# Altium PCB Pedal_Filters_45.PcbDoc (part 3 of 4)
Units mil, origin at the board's own origin, x right, y up, seen from the top; angles counter-clockwise.
Board outline 4875 x 3407.56 mil, 4 copper layers (Top Layer, Layer 1, Layer 2, Bottom Layer); 245 components, 181 nets, 874 pads, 470 vias.
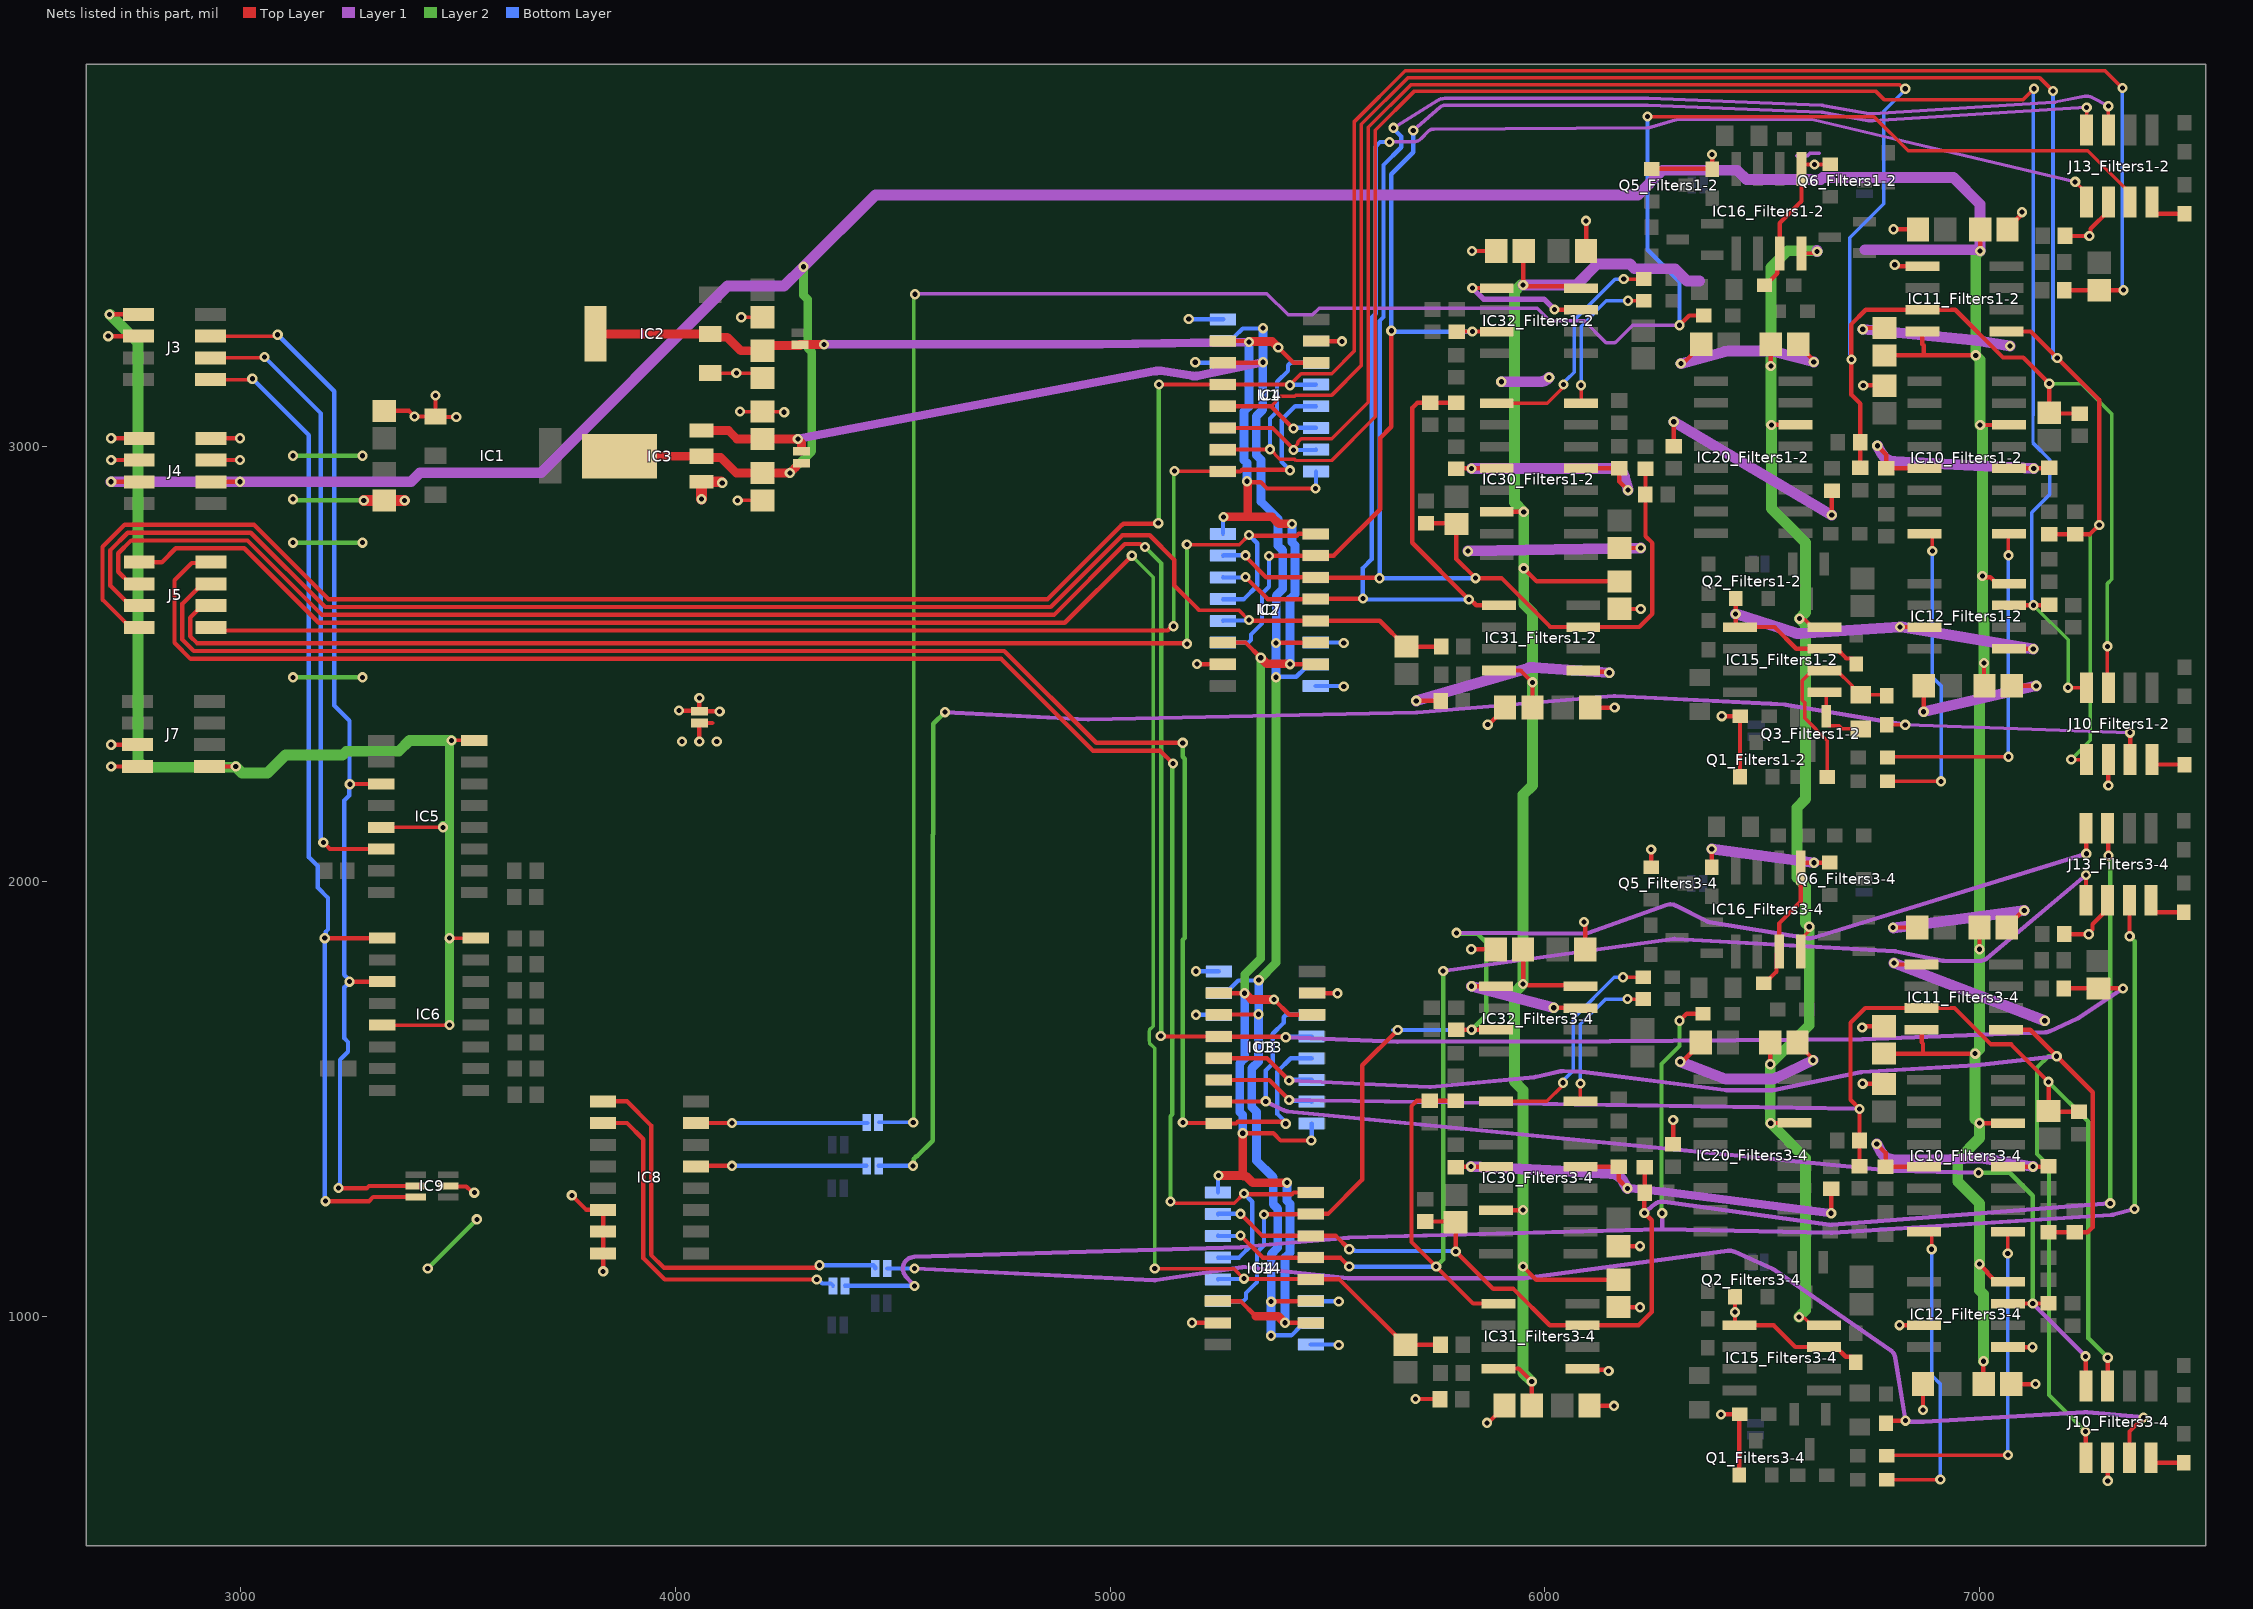
[diagram p4: the nets of this part, all layers, seen from the top]

## Via types
v1: diameter 23.62, hole 11.81, Top Layer to Bottom Layer, 470 vias

## Nets (pads, with @x,y where several pads share a name; then routed paths per layer and width w, separated by ;. In a path a pad name is that pad's centre, name@x,y a point inside that pad or via, vN(x,y) a via of type N, cw(c..) or ccw(c..) an arc to the next point about the centre after c; other vN are vias at no path point) (continued)
+V_MUX: C4.2 IC2.2 IC2.4 IC4.2 IC4.14 IC7.2 IC7.14 IC13.2 IC13.14 IC14.2 IC14.14 J1.1 U1.16 U2.16 U3.16 U4.16 | length 5561.9
  Top Layer w10: IC14.14@5247.63,1035.08 5299.92,1035.08 5334.92,1000.08 ; IC13.2@5250.08,1743.74 5250.23,1743.59 5309.19,1743.59 v1@5310.14,1742.64 ; IC7.14@5259.09,2550.08 5311.37,2550.08 v1(5346.37,2515.08) ; IC4.2@5259.57,3243.74 5319.04,3243.74 v1@5320.14,3242.64 ; v1(5305.04,1421.22) 5375.55,1421.22 5392.13,1404.64 v1(5462.64,1404.64) ; v1@5317.52,2918.74 5346.85,2918.74 5360.95,2904.64 v1(5472.64,2904.64) ; v1(5376.85,1728.74) 5411.85,1693.74 IC13.14@5464.14,1693.74 ; v1(5386.85,3228.74) 5421.85,3193.74 IC4.14@5474.14,3193.74 ; v1@5401.63,986.18 5402.58,985.23 5461.54,985.23 IC14.2@5461.69,985.08 ; v1@5413.09,2501.18 5414.04,2500.23 5473.51,2500.23 IC7.2@5473.66,2500.08
  Top Layer w20: IC2.4@3816.22,3260.16 IC2.2@4080,3260.16 4087.66,3252.5 4119.06,3252.5 4150.07,3221.5 C4.2@4200,3221.5 4212.04,3233.54 J1.1@4286.59,3233.54 ; J1.1@4286.59,3235.67 v1(4341.73,3235.67) ; v1(5249.13,1324.18) 5304.97,1324.18 ; v1(5260.59,2839.18) 5316.43,2839.18 ; v1(5305.04,1421.22) v1(5305.04,1421.22) 5304.97,1324.18 ; v1@5310.14,1742.64 5310.25,1742.75 5311.01,1742.75 5325.02,1728.74 v1(5376.85,1728.74) ; v1(5315.04,2921.22) 5315.74,2920.53 5315.74,2917.96 5316.43,2917.27 5316.43,2839.18 ; v1(5319.34,3241.65) 5320.14,3242.45 5320.14,3242.64 5372.95,3242.64 v1(5386.85,3228.74) ; 5334.92,1000.08 5386.75,1000.08 5400.76,986.07 5401.53,986.07 v1@5401.63,986.18 ; v1(5346.37,2515.08) 5360.28,2501.18 v1@5413.09,2501.18 ; v1(5406.73,1307.6) 5327.9,1307.6 5313.07,1322.44 5306.72,1322.44 5304.97,1324.18 ; v1(5418.19,2822.6) 5417.49,2823.29 5388.16,2823.29 5372.27,2839.18 5316.43,2839.18
  Layer 1 w20: v1(4341.73,3235.67) 4981.2,3236.46 ccw(c4981.16,3268.27) 4981.65,3236.46 v1(5319.34,3241.65)
  Layer 2 w20: v1(5309.34,1743.44) 5309.96,1744.06 5309.96,1786.64 5346.37,1823.05 v1(5346.37,2515.08)
  Bottom Layer w10: U4.16@5248.15,1285.08 5248.15,1323.19 v1(5249.13,1324.18) ; U2.16@5259.6,2800.08 5259.6,2838.19 v1(5260.59,2839.18) ; v1(5462.64,1404.64) 5463.63,1405.62 U3.16@5463.63,1443.74 ; v1(5472.64,2904.64) 5473.63,2905.62 U1.16@5473.63,2943.74
  Bottom Layer w20: v1(5305.04,1421.22) 5304.97,1421.29 5304.97,1463.03 5298.12,1469.88 5298.12,1572.5 5298.12,1582.13 5309.33,1593.34 v1(5309.34,1743.44) ; v1(5315.04,2921.22) 5314.97,2921.29 5314.97,2963.03 5308.12,2969.88 5308.12,3072.5 5308.12,3082.13 5319.33,3093.34 v1@5319.33,3241.64 ; v1(5402.43,985.38) 5402.44,1135.48 5413.65,1146.69 5413.65,1156.32 5413.65,1258.94 5406.8,1265.79 5406.8,1307.53 v1(5406.73,1307.6) ; v1(5413.89,2500.38) 5413.89,2650.48 5425.11,2661.69 5425.11,2671.32 5425.11,2773.94 5418.26,2780.79 5418.26,2822.53 v1(5418.19,2822.6)
-12: C7.1 C20_Filters1-2.2 C20_Filters3-4.2 C21_Filters1-2.2 C21_Filters3-4.2 C22_Filters1-2.2 C22_Filters3-4.2 C23_Filters1-2.2 C23_Filters3-4.2 C24_Filters1-2.2 C24_Filters3-4.2 C25_Filters1-2.2 C25_Filters3-4.2 C26_Filters1-2.2 C26_Filters3-4.2 IC3.2 IC3.4 IC10_Filters1-2.6 IC10_Filters3-4.6 IC11_Filters1-2.8 IC11_Filters3-4.8 IC12_Filters1-2.8 IC12_Filters3-4.8 IC15_Filters1-2.4 IC15_Filters3-4.4 IC16_Filters1-2.4 IC16_Filters3-4.4 IC20_Filters1-2.6 IC20_Filters3-4.6 IC30_Filters1-2.6 IC30_Filters3-4.6 IC31_Filters1-2.4 IC31_Filters3-4.4 IC32_Filters1-2.4 IC32_Filters3-4.4 J2.2 J4.5 J4.6 | length 17229.4
  Top Layer w8: v1(6584.66,998.7) 6587.65,995.71 6597.7,995.71 6614,979.41 IC15_Filters3-4.4@6642,979.41 ; v1(6586.16,2605.05) 6589.15,2602.06 6599.2,2602.06 6615.5,2585.76 IC15_Filters1-2.4@6643.5,2585.76 ; IC16_Filters3-4.4@6589,1839 6589,1867 6605.3,1883.3 6605.3,1893.35 v1(6608.29,1896.34) ; IC16_Filters1-2.4@6590.5,3445.35 6617.97,3445.35 6622.36,3449.73 v1(6626.58,3449.73)
  Top Layer w10: v1(2701.81,2920) J4.6@2766.46,2920 ; J4.5@2931.81,2920 v1(2998.27,2920) ; IC30_Filters3-4.6@5888,1244.41 v1(5950,1244.41) ; IC30_Filters1-2.6@5889.5,2850.76 v1(5951.5,2850.76) ; IC31_Filters3-4.4@5893,879.41 5893.59,880 5940,880 v1(5970,850) C21_Filters3-4.2@5970,794.41 ; IC31_Filters1-2.4@5894.5,2485.76 5944.24,2485.76 v1(5971.5,2458.5) C21_Filters1-2.2@5971.5,2400.76 ; v1@5949.67,3370.76 5950.45,3369.97 6078.99,3369.97 IC32_Filters1-2.4@6083.35,3365.61 ; v1(5950,1114.41) 5980,1084.41 C25_Filters3-4.2@6170,1084.41 ; C22_Filters3-4.2@5950,1844.41 v1(5950,1764.41) 5952.57,1761.84 6079.29,1761.84 IC32_Filters3-4.4@6081.86,1759.27 ; v1(5950.16,3372.58) 5950.16,3449.43 C22_Filters1-2.2@5951.5,3450.76 ; v1(5951.5,2720.76) 5981.5,2690.76 C25_Filters1-2.2@6171.5,2690.76 ; v1(6518.5,1580) C26_Filters3-4.2@6518.5,1630 ; v1(6519.7,1444.15) 6520.24,1444.69 6574.28,1444.69 IC20_Filters3-4.6@6574.83,1445.23 ; v1(6520,3186.35) C26_Filters1-2.2@6520,3236.35 ; v1(6521.2,3050.5) 6521.74,3051.04 6575.78,3051.04 IC20_Filters1-2.6@6576.32,3051.58 ; C23_Filters3-4.2@6780,1604.41 6870,1604.41 ; C23_Filters1-2.2@6781.5,3210.76 6871.5,3210.76 ; IC11_Filters3-4.8@6867,1659.41 6867,1630.41 6870,1627.41 6870,1604.41 ; IC11_Filters1-2.8@6868.5,3265.76 6868.5,3236.76 6871.5,3233.76 6871.5,3210.76 ; v1(6990,1604.41) 6870,1604.41 ; v1(6991.5,3210.76) 6871.5,3210.76 ; v1(7000,1120) 7017.86,1102.14 7017.86,1099.55 7038,1079.41 IC12_Filters3-4.8@7066,1079.41 ; v1(7000,1444.41) IC10_Filters3-4.6@7066,1444.41 ; v1(7000,1844.41) C20_Filters3-4.2@7000,1894.41 ; v1(7001.5,3050.76) IC10_Filters1-2.6@7067.5,3050.76 ; v1(7001.5,3450.76) C20_Filters1-2.2@7001.5,3500.76 ; v1(7006.54,2703.31) 7009.15,2700.71 7024.55,2700.71 7039.5,2685.76 IC12_Filters1-2.8@7067.5,2685.76 ; v1(7009.03,896.58) 7009.03,845.38 C24_Filters3-4.2@7010,844.41 ; v1(7010.53,2502.93) 7010.53,2451.73 C24_Filters1-2.2@7011.5,2450.76
  Top Layer w20: IC3.4@3871.02,2979.06 IC3.2@4060,2979.06 4063.38,2975.68 4104.32,2975.68 4140,2940 C7.1@4200,2940 v1(4263.13,2940) J2.2@4276.14,2953.02
  Layer 1 w8: 6580,3670 6604.43,3670 6609.99,3675.56 6631.38,3675.56
  Layer 1 w25: v1(2701.81,2920) v1(2998.27,2920) 3391.48,2920 3412.33,2940.85 3690.85,2940.85 4120,3370 4249.98,3370 v1(4294.67,3414.69) ; v1(4294.67,3414.69) 4460,3580 6214.63,3580 6271.28,3636.66 6442.48,3636.66 6463.7,3615.44 6634.9,3615.44 6639.46,3620 6940,3620 7001.5,3558.5 v1(7001.5,3450.76) 6998.56,3453.69 6736.31,3453.69 ; v1(5950.16,3372.58) 6072.58,3372.58 6120.66,3420.66 6195.71,3420.66 6206.37,3410 6299.32,3410 6327.28,3382.04 6355.71,3382.04 ; v1(6626.58,3449.73) v1@6626.58,3451.75
  Layer 2 w20: v1(4263.13,2940) 4313.31,2990.18 4313.31,3219.11 4303.99,3228.42 4303.99,3339.84 4294.67,3349.16 v1(4294.67,3414.69)
  Layer 2 w25: v1(5950.16,3372.58) 5944.64,3372.58 5930,3357.94 5930,2872.25 v1(5951.5,2850.76) v1(5951.5,2720.76) 5951.5,2638.5 5971.5,2618.5 v1(5971.5,2458.5) 5971.5,2221.5 5950,2200 v1(5950,1764.41) 5930,1744.41 5930,1540 5950,1520 v1(5950,1244.41) v1(5950,1114.41) 5950,870 v1(5970,850) ; v1(6584.66,998.7) 6600,1014.03 6600,1363.86 v1(6519.7,1444.15) 6518.5,1445.35 v1(6518.5,1580) 6608.29,1669.78 v1(6608.29,1896.34) 6600,1904.63 6600,1990 6580,2010 6580,2170 6600,2190 6600,2591.2 v1(6586.16,2605.05) 6600,2618.89 6600,2780 6521.2,2858.8 v1(6521.2,3050.5) 6520,3051.7 v1(6520,3186.35) 6520,3412.9 6558.61,3451.51 6624.81,3451.51 v1(6626.58,3449.73) ; v1(7001.5,3450.76) 6991.5,3440.76 v1(6991.5,3210.76) 7001.5,3200.76 v1(7001.5,3050.76) 7006.54,3045.71 v1(7006.54,2703.31) 7006.54,2603.46 7010.53,2599.47 v1(7010.53,2502.93) 7010,2502.4 7010,2450 7000,2440 v1(7000,1844.41) 7000,1614.41 v1(6990,1604.41) 6990,1454.41 v1(7000,1444.41) 7000,1410 6950,1360 6950,1310 7000,1260 v1(7000,1120) 7000,1060 7009.03,1050.97 v1(7009.03,896.58)
-V_MUX: C8.1 IC3.3 IC4.3 IC7.3 IC13.3 IC14.3 J2.1 U1.7 U2.7 U3.7 U4.7 | length 4545.8
  Top Layer w10: IC13.3@5250.08,1693.74 5250.72,1694.37 5340.79,1694.37 v1(5341.42,1695.01) ; IC4.3@5259.57,3193.74 5350.15,3193.74 v1(5351.42,3195.01) ; v1(5370.35,1033.81) 5370.98,1034.45 5461.06,1034.45 IC14.3@5461.69,1035.08 ; v1(5381.81,2548.81) 5382.44,2549.45 5472.51,2549.45 IC7.3@5473.15,2550.08
  Top Layer w20: IC3.3@4060,3038.11 4121.89,3038.11 4141.5,3018.5 C8.1@4200,3018.5 v1(4281.5,3018.5) 4290,3010 J2.1@4290,2990
  Layer 1 w20: v1(4281.5,3018.5) 5106.72,3174.99 cw(c5112.65,3143.74) 5117.67,3175.15 5190.77,3163.47 ccw(c5195.79,3194.89) 5202.31,3163.75 v1(5351.42,3195.01)
  Layer 2 w20: v1(5341.77,1773.46) 5381.46,1813.15 v1(5381.46,2470.36)
  Bottom Layer w10: U3.7@5250.08,1743.74 5266.34,1743.74 5275.12,1752.52 5275.12,1752.89 5294.83,1772.59 5340.9,1772.59 v1(5341.77,1773.46) ; U1.7@5260.08,3243.74 5276.34,3243.74 5285.12,3252.52 5285.12,3252.89 5304.83,3272.59 5350.9,3272.59 v1(5351.77,3273.46) ; v1(5370,955.36) 5370.87,956.22 5416.94,956.22 5436.65,975.93 5436.65,976.3 5445.43,985.08 U4.7@5461.69,985.08 ; v1(5381.46,2470.36) 5382.32,2471.22 5428.4,2471.22 5448.11,2490.93 5448.11,2491.3 5456.89,2500.08 U2.7@5473.15,2500.08
  Bottom Layer w20: v1(5341.77,1773.46) 5341.77,1695.36 v1(5341.42,1695.01) 5341.42,1585.83 5326.12,1570.53 5326.12,1560.91 5326.12,1481.48 5336.85,1470.74 5336.85,1358.14 5374.92,1320.08 5374.92,1258.07 5385.65,1247.34 5385.65,1167.91 5385.65,1158.29 5370.35,1142.99 v1(5370.35,1033.81) 5370,1033.46 v1(5370,955.36) ; v1(5351.77,3273.46) 5351.77,3195.36 v1(5351.42,3195.01) 5351.42,3085.83 5336.12,3070.53 5336.12,3060.91 5336.12,2981.48 5346.85,2970.74 5346.85,2874.6 5386.37,2835.08 5386.37,2773.07 5397.11,2762.34 5397.11,2682.91 5397.11,2673.29 5381.81,2657.99 v1(5381.81,2548.81) 5381.46,2548.46 v1(5381.46,2470.36)
CLK: IC5.11 IC6.11 IC9.2 J3.3 | length 2541.8
  Top Layer w8: J3.3@2930,3255 3077.36,3255 3080.63,3258.27 v1(3084.86,3258.27)
  Top Layer w10: v1(3225,1295) 3290,1295 3295,1300 IC9.2@3402.6,1300 ; v1(3250,1770) IC6.11@3325.43,1770 ; v1(3250.91,2224.09) 3251.37,2224.54 3322.26,2224.54 IC5.11@3322.72,2225
  Bottom Layer w10: v1(3084.86,3258.27) 3214.86,3128.27 3214.86,2405.14 3250,2370 v1@3250,2225 ; v1(3225,1295) 3227.61,1297.61 3227.61,1307.09 3228.19,1307.67 3228.19,1590.27 3246.81,1608.89 3246.81,1631.11 3238.38,1639.54 3238.38,1757.33 3250,1768.96 3250,1773.69 3238.19,1785.5 3238.19,2186.7 3249.68,2198.19 3249.68,2222.85 v1(3250.91,2224.09)
DGND: IC5.8 IC5.13 IC6.8 IC6.13 J3.2 J3.4 J6.1 J7.6 J7.7 J7.8 | length 3297
  Top Layer w8: IC5.13@3322.72,2125 v1(3465,2125) ; IC6.13@3325.43,1670 v1(3480,1670) ; v1(3480,1870) IC6.8@3540,1870 ; v1(3485,2325) IC5.8@3537.28,2325
  Top Layer w10: v1(2695,3255) J3.4@2764.65,3255 ; v1(2698.19,3305) J3.2@2764.65,3305 ; v1(2701.81,2265) J7.8@2762.32,2265 ; v1(2701.81,2315) J7.6@2762.32,2315 ; J7.7@2927.68,2265 2927.78,2265.1 2988.2,2265.1 v1(2988.3,2265.2) ; v1(4055,2322.56) J6.1@4055,2365 4085,2365
  Layer 2 w20: v1(3465,2125) 3465,2130 3480,2130 ; v1(3480,1670) v1(3480,1870) 3480,2130 ; v1(3485,2325) 3485,2324.02 3480,2319.02 3480,2130
  Layer 2 w25: v1@2699.07,3305 2763.43,3240.64 2763.43,2277.74 2778.07,2263.09 2986.19,2263.09 v1(2988.3,2265.2) 2987.87,2264.77 3002.46,2250.19 3061.67,2250.19 3102.98,2291.5 3234.21,2291.5 3242.71,2300 3363.33,2300 3388.33,2325 v1(3485,2325)
  other v1: 4015,2322.56 4095,2322.56
F1: IC8.13 J14.1 | length 393.2
  Top Layer w10: IC8.13@4047.13,1344.71 4048.66,1346.24 v1(4130,1346.24)
  Bottom Layer w10: v1(4130,1346.24) J14.1@4439.65,1346.24
F2: IC8.15 J16.1 | length 393.8
  Top Layer w10: IC8.15@4047.13,1444.71 v1(4130,1444.71)
  Bottom Layer w10: v1(4130,1444.71) J16.1@4440.91,1444.71
F3: IC8.1 J18.1 | length 966.9
  Top Layer w10: IC8.1@3833.58,1494.71 3888.5,1494.71 3944,1439.21 3944,1141.37 3973.71,1111.67 4321.45,1111.67 4327.46,1117.68 v1(4331.15,1117.68)
  Bottom Layer w10: v1(4331.15,1117.68) 4455.16,1117.68 4460,1112.83 J18.1@4460,1110
F4: IC8.2 J20.1 | length 844.6
  Top Layer w10: IC8.2@3833.58,1444.71 3888.5,1444.71 3926,1407.21 3926,1133.91 3975.32,1084.6 v1(4325.13,1084.6)
  Bottom Layer w10: v1(4325.13,1084.6) 4328.82,1084.6 4337.74,1075.67 4357.6,1075.67 4362.44,1070.83 J20.1@4362.44,1070
F_POT_T1_Filters1-2: J10_Filters1-2.1 R46_Filters1-2.2 | length 79.1
  Top Layer w10: J10_Filters1-2.1@7396.5,2279.38 7406.46,2269.42 R46_Filters1-2.2@7471.5,2269.42
F_POT_T1_Filters3-4: J10_Filters3-4.1 R46_Filters3-4.2 | length 80.7
  Top Layer w10: J10_Filters3-4.1@7395,674.65 7395,673.03 7404.96,663.07 R46_Filters3-4.2@7470,663.07
F_POT_T2_Filters1-2: J13_Filters1-2.1 R56_Filters1-2.2 | length 96.5
  Top Layer w10: J13_Filters1-2.1@7396.5,3563.67 7396.5,3546.31 7406.46,3536.35 R56_Filters1-2.2@7471.5,3536.35
F_POT_T2_Filters3-4: J13_Filters3-4.1 R56_Filters3-4.2 | length 96.5
  Top Layer w10: J13_Filters3-4.1@7395,1957.32 7395,1939.96 7404.96,1930 R56_Filters3-4.2@7470,1930
F_POT_W1_Filters1-2: J10_Filters1-2.3 J14.2 R47_Filters1-2.1 | length 3992.5
  Top Layer w8: R47_Filters1-2.1@6786.5,2360.76 v1(6829.24,2360.76)
  Top Layer w10: J10_Filters1-2.3@7346.5,2280.99 v1(7346.5,2342.8)
  Layer 1 w8: v1(6829.24,2360.76) v1(7346.5,2342.8)
  Layer 1 w10: v1(4620,2390) 4948.63,2373.22 ccw(c4950,2400) 4950.57,2373.2 5704.77,2389.22 ccw(c5704.2,2416.02) 5706.44,2389.31 6158.36,2427.21 cw(c6160.6,2400.49) 6161.97,2427.27 6520.13,2408.98 ccw(c6521.5,2435.76) 6520.24,2408.98 6550.81,2407.54 cw(c6549.55,2380.76) 6554.01,2407.19 v1(6829.24,2360.76)
  Layer 2 w10: v1(4546.24,1346.24) 4548.18,1348.18 4548.18,1362.21 4554.04,1368.07 4555.98,1368.07 4592,1404.08 4592,2107.46 4593.3,2108.76 4593.3,2363.3 v1(4620,2390)
  Bottom Layer w10: J14.2@4467.2,1346.24 v1(4546.24,1346.24)
F_POT_W1_Filters3-4: J10_Filters3-4.3 J18.2 R47_Filters3-4.1 | length 3254.8
  Top Layer w10: R47_Filters3-4.1@6785,754.41 6790.59,760 v1(6830,760) ; J10_Filters3-4.3@7345,674.65 7345.13,674.77 7345.13,735.07 v1(7377.55,767.5)
  Layer 1 w10: v1(4550,1110) 5101.33,1083.22 ccw(c5102.64,1110) 5106.63,1083.49 5303.83,1113.23 cw(c5307.83,1086.72) 5310.72,1113.38 5547.11,1087.75 ccw(c5550,1114.41) 5550,1087.6 5950,1087.6 ccw(c5950,1114.41) 5953.59,1087.84 6421.06,1150.97 cw(c6424.69,1124.41) 6435.72,1148.84 6525.35,1108.36 cw(c6514.31,1083.93) 6529.57,1105.97 6795.26,922.04 cw(c6780,900) 6806.46,904.32 v1(6830,760) ; v1(7377.55,767.5) 7248.22,779.62 ccw(c7244.04,735) 7241.37,779.73 6871.6,757.65 cw(c6870,784.41) 6869.9,757.6 6838.82,757.71 cw(c6838.87,767.71) 6835.92,758.16 v1(6830,760) ; v1(6830,760) 6829.7,760.3 v1(6830,760)
  Bottom Layer w10: J18.2@4487.56,1110 v1(4550,1110)
F_POT_W2_Filters1-2: J13_Filters1-2.3 J16.2 R58_Filters1-2.1 | length 5601
  Top Layer w8: v1(6236.29,3760.1) 6757.27,3760.1 6835.77,3681.59 7249.05,3681.59 7346.5,3584.14 J13_Filters1-2.3@7346.5,3563.67
  Top Layer w10: v1(6310,3280) 6332.35,3302.35 R58_Filters1-2.1@6365.5,3302.35
  Layer 1 w8: v1(4551.07,3351.55) 4552.49,3352.97 5360.53,3352.97 5409.31,3304.19 5465.45,3304.19 5480.81,3319.55 5982.22,3319.55 6011.38,3290.38 6090.37,3290.38 6138.46,3242.29 ccw(c6144.09,3247.97) 6144.06,3239.97 6151.4,3239.95 ccw(c6151.5,3265.76) 6151.5,3239.95 6158.87,3239.95 ccw(c6158.87,3247.95) 6164.53,3242.29 6202.24,3280 v1(6310,3280)
  Layer 2 w8: v1(4547.19,1446.08) 4548.59,1447.49 4548.59,3349.07 v1(4551.07,3351.55)
  Bottom Layer w8: J16.2@4467.15,1446.08 v1(4547.19,1446.08)
  Bottom Layer w10: v1(6236.29,3760.1) 6236.27,3453.73 6310,3380 v1(6310,3280)
F_POT_W2_Filters3-4: J13_Filters3-4.3 J20.2 R58_Filters3-4.1 | length 4336.8
  Top Layer w10: v1(6310,1680) 6310.26,1680 6326.26,1696 R58_Filters3-4.1@6364,1696 ; J13_Filters3-4.3@7345,1957.32 7345.24,1957.08 7345.24,1874.76 v1(7345.48,1874.52)
  Layer 1 w10: v1(4550,1070) 4530.1,1092.03 cw(c4550,1110) 4549.2,1136.8 5300.76,1159.31 ccw(c5299.96,1186.11) 5302.32,1159.4 5547.64,1181.12 cw(c5550,1154.41) 5549.3,1181.21 6269.74,1200 cw(c6270,1190) 6270,1200 ; v1(6270,1237.07) 6270,1200 ; v1(7356.81,1246.81) 7307.53,1234.05 cw(c7300.81,1260) 7302.52,1233.24 6661.58,1192.39 cw(c6658.73,1237.11) 6657.85,1192.31 6270.2,1200 ccw(c6270,1190) 6270,1200
  Layer 2 w10: 6268.45,1440.6 6268.45,1580.47 6310,1622.01 v1(6310,1680) ; 6268.48,1440.57 6268.48,1238.58 v1(6270,1237.07) ; v1(7345.48,1874.52) 7356.81,1863.19 v1(7356.81,1246.81)
  Bottom Layer w10: J20.2@4390,1070 v1(4550,1070)
Fbp1_Filters1-2: C6_Filters1-2.1 IC4.6 IC11_Filters1-2.7 J10_Filters1-2.6 R4_Filters1-2.1 R9_Filters1-2.2 R15_Filters1-2.2 U1.15 | length 4848.4
  Top Layer w8: v1@5421.3,2997.82 5422.37,2997.82 5431.63,3007.07 5431.63,3011.5 5439.06,3018.94 5509.62,3018.94 5594.06,3103.39 5594.06,3735.64 5692.33,3833.91 6815.26,3833.91 6824.98,3824.19 v1(6829.21,3824.19) ; v1(7294.44,2541.42) 7294.44,2448.4 J10_Filters1-2.6@7296.5,2446.35
  Top Layer w10: IC4.6@5259.57,3043.74 5373.39,3043.74 v1@5419.31,2997.82 ; v1@6704.69,3201.2 6705.35,3200.54 6705.35,3120.01 6725.5,3099.87 R4_Filters1-2.1@6725.5,2951.94 ; v1@6704.69,3201.87 6704.69,3281.86 6738.58,3315.76 6944.11,3315.76 7054.11,3205.76 7100.5,3205.76 v1(7160.5,3145.76) C6_Filters1-2.1@7160.5,3078.75 7162.31,3076.94 R9_Filters1-2.2@7230.5,3076.94
  Layer 2 w8: v1(7160.5,3145.76) 7234.24,3145.76 7304.06,3075.94 7304.06,2695.52 7294.44,2685.9 v1(7294.44,2541.42)
  Bottom Layer w8: 6701.28,3213.7 6701.28,3481.28 6780,3560 6780,3772.42 6829.21,3821.62 v1(6829.21,3824.19)
  Bottom Layer w10: v1(5421.81,2993.03) 5472.92,2993.03 U1.15@5473.63,2993.74
  other v1: 6705.35,3201.2
Fbp1_Filters3-4: C6_Filters3-4.1 IC11_Filters3-4.7 IC13.6 J10_Filters3-4.6 R4_Filters3-4.1 R9_Filters3-4.2 R15_Filters3-4.2 U3.15 | length 3318.9
  Top Layer w10: IC13.6@5250.08,1543.74 5365.89,1543.74 v1(5411.81,1497.82) ; R4_Filters3-4.1@6724,1345.59 v1(6724,1477.26) 6703.19,1498.07 6703.19,1675.51 6737.08,1709.41 6942.62,1709.41 7026.31,1625.71 7072.7,1625.71 v1(7159,1539.41) C6_Filters3-4.1@7159,1472.4 7160.81,1470.59 R9_Filters3-4.2@7229,1470.59 ; J10_Filters3-4.6@7295,840 v1(7295,905)
  Layer 1 w10: v1(5411.81,1497.82) v1(6724,1477.26)
  Layer 2 w10: v1(7159,1539.41) 7250,1448.41 7250,950 v1(7295,905)
  Bottom Layer w10: v1(5411.81,1497.82) 5413.85,1495.78 5461.59,1495.78 U3.15@5463.63,1493.74
Fbp2_Filters1-2: C11_Filters1-2.1 IC7.6 IC31_Filters1-2.7 J13_Filters1-2.6 R16_Filters1-2.2 R24_Filters1-2.2 R29_Filters1-2.1 U2.15 | length 4416.8
  Top Layer w8: J13_Filters1-2.6@7296.5,3729.02 v1(7296.5,3784.19)
  Top Layer w10: v1(5311.41,2750.79) 5311.41,2748 5359.33,2700.08 5403.48,2700.08 IC7.6@5473.15,2700.08 5474.15,2699.07 5618.74,2699.07 v1(5619.75,2698.07) ; R24_Filters1-2.2@5726.5,2824.58 5794.68,2824.58 C11_Filters1-2.1@5796.5,2822.76 5796.5,2742.47 v1(5840.65,2698.32) 5900.32,2698.32 6012.88,2585.76 IC31_Filters1-2.7@6088.5,2585.76 6217.06,2585.76 6247.53,2616.23 6247.53,2778.87 6231.5,2794.91 R29_Filters1-2.1@6231.5,2949.58
  Layer 1 w8: v1(5651.74,3734.18) 5753.03,3797.09 cw(c5769.91,3769.91) 5769.91,3801.91 6236.29,3801.91 cw(c6236.29,3760.1) 6237.99,3801.88 6637.37,3785.88 cw(c6636.09,3753.91) 6641.71,3785.41 6746.72,3766.7 ccw(c6751.29,3792.1) 6752.95,3766.34 7170.66,3793.24 ccw(c7169,3819) 7173.83,3793.65 7241.67,3806.57 cw(c7246.5,3781.21) 7258.46,3804.08 v1(7296.5,3784.19) v1@7296.15,3783.85
  Bottom Layer w10: U2.15@5259.6,2750.08 5260.31,2750.79 v1(5311.41,2750.79) ; v1(5651.74,3734.18) 5651.74,3732.11 5669.66,3714.19 5669.66,3689.66 5628.89,3648.89 5628.89,3298.89 5620,3290 5620,2698.32 v1(5840.65,2698.32)
Fbp2_Filters3-4: C11_Filters3-4.1 IC14.6 IC31_Filters3-4.7 J13_Filters3-4.6 R16_Filters3-4.2 R24_Filters3-4.2 R29_Filters3-4.1 U4.15 | length 3536.6
  Top Layer w10: v1(5299.96,1235.79) 5350.66,1185.08 5519.33,1185.08 v1(5550,1154.41) ; R24_Filters3-4.2@5725,1218.23 5793.19,1218.23 C11_Filters3-4.1@5795,1216.42 v1(5795,1149.41) 5881.3,1063.11 5927.69,1063.11 6011.38,979.41 IC31_Filters3-4.7@6087,979.41 6215.56,979.41 6246.04,1009.88 6246.04,1220.86 v1(6229.04,1237.85) 6229.04,1283.45 R16_Filters3-4.2@6230,1284.41 R29_Filters3-4.1@6230,1343.23 ; J13_Filters3-4.6@7295,2122.68 7295.96,2121.71 7295.96,2060.73 v1(7296.93,2059.77)
  Layer 1 w10: v1(6229.04,1237.85) 6252.85,1257.67 cw(c6270,1237.07) 6273.7,1263.62 6655.04,1210.56 ccw(c6658.73,1237.11) 6660.81,1210.38 v1(7300.81,1260)
  Layer 2 w10: v1(7296.93,2059.77) 7296.93,2056.08 7300.81,2052.2 v1(7300.81,1260)
  Bottom Layer w10: U4.15@5248.15,1235.08 5248.85,1235.79 v1(5299.96,1235.79) ; v1(5550,1154.41) 5552.61,1151.8 5561.24,1151.8 5562.67,1150.38 5784.03,1150.38 v1@5785,1149.41
Fbyp_1: C9_Filters1-2.2 IC4.4 J5.8 R6_Filters1-2.1 U1.12 | length 6645.6
  Top Layer w8: v1(5413.94,3142.1) 5413.94,3143.82 5439.06,3168.94 5509.62,3168.94 5562.06,3221.39 5562.06,3748.9 5679.17,3866 7288.83,3866 v1(7328.83,3826)
  Top Layer w10: J5.8@2766.46,2585 2745.98,2585 2682.02,2648.96 2682.02,2770.26 2732.73,2820.96 3030.52,2820.96 3201.69,2649.79 4855.76,2649.79 5025.81,2819.84 5027.05,2819.84 5030.36,2823.16 5109.08,2823.16 v1(5110.69,2824.77) ; v1(5112.65,3143.74) IC4.4@5259.57,3143.74 v1@5412.3,3143.74 ; R6_Filters1-2.1@7195.5,3360.76 v1(7331.5,3360.76)
  Layer 2 w10: v1(5110.69,2824.77) 5111.57,2825.65 5111.57,3142.66 v1(5112.65,3143.74)
  Bottom Layer w8: v1@7328.83,3362.75 v1(7328.83,3826)
  Bottom Layer w10: v1(5413.94,3142.1) 5414.76,3142.92 5472.8,3142.92 U1.12@5473.63,3143.74
Fbyp_2: C10_Filters1-2.2 IC7.4 J5.6 R27_Filters1-2.1 U2.12 | length 3585.6
  Top Layer w8: 5204.21,2624.88 5296.13,2624.88 v1(5319.29,2601.72)
  Top Layer w10: J5.6@2766.46,2635 2745.98,2635 2700.02,2680.96 2700.02,2762.8 2740.18,2802.96 3023.07,2802.96 3194.24,2631.79 4863.22,2631.79 5028.24,2796.81 5091.11,2796.81 5147.66,2740.26 5147.66,2681.43 5204.21,2624.88 ; v1(5319.29,2601.72) 5320.93,2600.08 5620.2,2600.08 5679.53,2540.76 R27_Filters1-2.1@5761.5,2540.76
  Bottom Layer w10: U2.12@5259.6,2600.08 5260.42,2600.9 5318.47,2600.9 v1(5319.29,2601.72)
Fbyp_3: C9_Filters3-4.2 IC13.4 J5.4 R6_Filters3-4.1 U3.12 | length 6198.7
  Top Layer w10: J5.4@2766.46,2685 2745.98,2685 2718.02,2712.96 2718.02,2755.35 2747.64,2784.96 3015.61,2784.96 3186.78,2613.79 4870.68,2613.79 5033.7,2776.81 5069.5,2776.81 5076.31,2770 v1(5080,2770) ; v1(5116.33,1645.02) 5117.61,1643.74 IC13.4@5250.08,1643.74 5250.9,1642.92 5403.12,1642.92 v1(5403.94,1642.1) ; R6_Filters3-4.1@7194,1754.41 v1(7330,1754.41)
  Layer 1 w10: v1(5403.94,1642.1) 5660.53,1632.07 ccw(c5661.58,1658.86) 5661.61,1632.05 6150.03,1632.6 ccw(c6150,1659.41) 6150.23,1632.6 6730.23,1637.6 ccw(c6730,1664.41) 6730.99,1637.62 7150.99,1653.21 ccw(c7150,1680) 7161.19,1655.64 7225.19,1685.05 ccw(c7214,1709.41) 7228.86,1687.09 v1(7330,1754.41)
  Layer 2 w10: v1(5080,2770) 5117.92,2732.08 5117.92,1646.61 v1(5116.33,1645.02)
  Bottom Layer w10: v1(5403.94,1642.1) 5404.76,1642.92 5462.8,1642.92 U3.12@5463.63,1643.74
Fbyp_4: C10_Filters3-4.2 IC14.4 J5.2 R27_Filters3-4.1 U4.12 | length 4891.2
  Top Layer w8: v1(5102.64,1110) 5284.55,1110 v1(5307.83,1086.72)
  Top Layer w10: J5.2@2766.46,2735 2818.44,2735 2850.4,2766.96 3008.15,2766.96 3179.32,2595.79 4895.79,2595.79 v1(5050,2750) ; v1(5307.83,1086.72) 5308.65,1085.9 5460.87,1085.9 IC14.4@5461.69,1085.08 5527.36,1085.08 5678.03,934.41 R27_Filters3-4.1@5760,934.41
  Layer 2 w8: v1(5050,2750) 5099.47,2700.53 5099.47,1667.81 5090.56,1658.9 5090.56,1655.76 5090.51,1655.71 5090.51,1634.33 5090.56,1634.28 5090.56,1628.57 5102.64,1616.5 v1(5102.64,1110)
  Bottom Layer w10: U4.12@5248.15,1085.08 5248.97,1085.9 5307.01,1085.9 v1(5307.83,1086.72)
Fhp1_Filters1-2: IC4.7 IC12_Filters1-2.7 J10_Filters1-2.8 R5_Filters1-2.2 U1.11 | length 4490.2
  Top Layer w8: v1@5367.42,2994.65 v1(5367.93,2994.65) 5390.58,2972.01 5424.57,2972.01 5427.64,2968.94 5509.62,2968.94 5610.06,3069.39 5610.06,3729.01 5698.96,3817.91 6761.98,3817.91 6781.51,3798.38 7099.66,3798.38 v1(7125.47,3824.19) ; v1(7203.8,2446.35) J10_Filters1-2.8@7246.5,2446.35
  Top Layer w10: IC4.7@5259.57,2993.74 5260.03,2994.2 v1@5367.47,2994.2 ; IC12_Filters1-2.7@7067.64,2635.9 7067.71,2635.83 7123.98,2635.83 v1(7124.05,2635.9) 7159.46,2635.9 R5_Filters1-2.2@7160.5,2636.94
  Layer 2 w8: v1(7124.05,2635.9) 7203.8,2556.14 v1(7203.8,2446.35)
  Bottom Layer w8: v1@7120,2638.43 7121.06,2639.49 7121.06,2647.34 7120,2648.4 7120,2849.26 7161.5,2890.76 7161.5,2970.76 7123.08,3009.17 7123.08,3072.34 7123.34,3072.6 7123.34,3822.06 v1(7125.47,3824.19)
  Bottom Layer w10: v1(5367.93,2994.65) 5367.93,3065.55 5383.99,3081.61 5383.99,3150.06 5409.05,3175.12 5409.05,3187.88 5414.91,3193.74 U1.11@5473.63,3193.74
Fhp1_Filters3-4: IC12_Filters3-4.7 IC13.7 J10_Filters3-4.8 R5_Filters3-4.2 U3.11 | length 2766
  Top Layer w10: IC13.7@5249.57,1493.74 5250.03,1494.2 5357.47,1494.2 v1(5357.93,1494.65) ; IC12_Filters3-4.7@7066.14,1029.55 7066.21,1029.48 7122.48,1029.48 v1(7122.55,1029.55) 7157.96,1029.55 R5_Filters3-4.2@7159,1030.59 ; v1(7244.11,907.99) 7244.56,907.55 7244.56,840.44 J10_Filters3-4.8@7245,840
  Layer 1 w10: v1(5357.93,1494.65) 5399.88,1473.81 ccw(c5411.81,1497.82) 5409.2,1471.13 6798.16,1334.88 ccw(c6804,1394.41) 6802.66,1334.61 v1(6997.76,1330.23) ; v1(7122.55,1029.55) v1(7244.11,907.99)
  Layer 2 w10: v1(6997.76,1330.23) 7069.77,1330.23 7122.55,1277.45 v1(7122.55,1029.55)
  Bottom Layer w10: v1(5357.93,1494.65) 5357.93,1565.55 5373.99,1581.61 5373.99,1650.06 5399.05,1675.12 5399.05,1687.88 5404.91,1693.74 U3.11@5463.63,1693.74
Fhp2_Filters1-2: IC7.7 IC32_Filters1-2.7 J13_Filters1-2.8 R28_Filters1-2.2 U2.11 | length 3387.4
  Top Layer w8: J13_Filters1-2.8@7246.5,3729.02 v1(7246.5,3781.21)
  Top Layer w10: v1(5365.3,2749.16) 5365.75,2749.62 IC7.7@5473.15,2749.62 ; IC7.7@5473.15,2750.08 5514.66,2750.08 5621.38,2856.81 5621.38,3020.93 5646.89,3046.45 v1(5646.89,3267.28) ; R28_Filters1-2.2@5797.53,3265.61 IC32_Filters1-2.7@5889.35,3265.61
  Layer 1 w8: v1(5697.31,3727.95) 5759.41,3781.98 cw(c5769.91,3769.91) 5769.91,3785.91 6236.29,3785.91 cw(c6236.29,3760.1) 6237.32,3785.89 6636.73,3769.9 cw(c6636.09,3753.91) 6638.9,3769.66 6743.96,3750.94 ccw(c6751.29,3792.1) 6753.9,3750.37 v1(7246.5,3781.21) 7241.81,3778 v1@7246.5,3773.31
  Bottom Layer w10: U2.11@5259.6,2550.08 5318.32,2550.08 5324.18,2555.94 5324.18,2568.7 5349.24,2593.76 5349.24,2662.21 5365.3,2678.27 v1(5365.3,2749.16) ; v1(5697.31,3727.95) 5697.31,3678.13 5646.89,3627.71 v1(5646.89,3267.28) 5648.96,3265.21 5822.84,3265.21 v1@5823.24,3265.61
  other v1: 5833.24,3265.61
Fhp2_Filters3-4: IC14.7 IC32_Filters3-4.7 J13_Filters3-4.8 R28_Filters3-4.2 U4.11 | length 3030.4
  Top Layer w10: v1(5353.84,1234.16) 5354.3,1234.62 IC14.7@5461.69,1234.62 ; IC14.7@5461.69,1235.08 5462.36,1235.75 5501.34,1235.75 5580.16,1314.57 5580.16,1577.44 v1(5661.58,1658.86) ; R28_Filters3-4.2@5796.04,1659.27 IC32_Filters3-4.7@5887.86,1659.27 ; J13_Filters3-4.8@7245,2122.68 7245.43,2122.25 7245.43,2064.71 v1(7245.85,2064.28)
  Layer 1 w10: v1(5796.85,1882.31) 6090.06,1880.19 ccw(c6090.25,1907) 6099.27,1881.75 6279.99,1946.25 cw(c6289,1921) 6301.13,1944.91 6371.87,1909.03 ccw(c6384,1932.94) 6379.68,1906.48 6603.97,1869.88 ccw(c6608.29,1896.34) 6616.17,1870.71 v1(7245.85,2064.28)
  Layer 2 w10: v1(5796.85,1882.31) 5799.3,1879.86 5845.87,1879.86 5865.33,1860.4 5865.33,1692.85 v1(5831.75,1659.27)
  Bottom Layer w10: U4.11@5248.15,1035.08 5306.86,1035.08 5312.72,1040.94 5312.72,1053.7 5337.78,1078.76 5337.78,1147.21 5353.84,1163.27 v1(5353.84,1234.16) ; v1@5651.58,1658.86 v1(5661.58,1658.86) 5821.34,1658.86 v1@5821.75,1659.27
Flp1_Filters1-2: IC4.5 IC11_Filters1-2.1 J10_Filters1-2.7 R7_Filters1-2.1 R10_Filters1-2.2 U1.14 | length 4590.9
  Top Layer w8: 5370.28,3093.74 5392.82,3116.28 5424.63,3116.28 5426.88,3118.53 5509.21,3118.53 5578.06,3187.39 5578.06,3742.27 5685.8,3850 7138,3850 v1(7169,3819) ; v1(7210.99,2280.99) J10_Filters1-2.7@7246.5,2280.99
  Top Layer w10: IC4.5@5259.57,3093.74 5370.28,3093.74 v1@5421.3,3042.71 ; IC11_Filters1-2.1@7062.5,3265.76 7118.1,3265.76 7275.5,3108.36 v1(7275.5,2820.76) 7254.31,2799.58 R7_Filters1-2.1@7160.5,2799.58
  Layer 2 w8: v1(7210.99,2280.99) 7255.12,2325.12 7255.12,2800.38 v1(7275.5,2820.76)
  Bottom Layer w10: v1(5421.81,3042.71) 5423.17,3044.07 5473.3,3044.07 U1.14@5473.63,3043.74 ; v1@7169,3204.86 v1(7169,3819)
  other v1: 7179,3204.86
Flp1_Filters3-4: IC11_Filters3-4.1 IC13.5 J10_Filters3-4.7 R7_Filters3-4.1 R10_Filters3-4.2 U3.14 | length 3689.2
  Top Layer w10: IC13.5@5250.08,1593.74 5360.79,1593.74 v1(5411.81,1542.71) ; IC11_Filters3-4.1@7061,1659.41 7116.6,1659.41 7260.7,1515.31 7260.7,1205.23 7248.7,1193.23 R7_Filters3-4.1@7159,1193.23 ; v1(7244.04,735) 7244.52,734.52 7244.52,675.13 J10_Filters3-4.7@7245,674.65
  Layer 1 w10: v1(5411.81,1542.71) 5733.75,1527.63 ccw(c5735,1554.41) 5737.53,1527.72 5976.07,1550.32 ccw(c5973.54,1577.01) 5979.47,1550.87 6035.8,1563.63 cw(c6041.72,1537.49) 6042.82,1564.27 6082.98,1562.62 cw(c6081.88,1535.84) 6085.25,1562.43 6413.96,1520.67 ccw(c6421.5,1580) 6421.5,1520.19 6518.5,1520.19 ccw(c6518.5,1580) 6530.55,1521.42 6725.77,1561.57 cw(c6731.17,1535.31) 6729.58,1562.07 6991.59,1577.65 ccw(c6990,1604.41) 6992.99,1577.77 v1(7177.51,1598.51)
  Layer 2 w10: v1(7177.51,1598.51) 7158.51,1598.51 7132.19,1572.19 7132.19,1373.49 7160,1345.68 7160,819.04 v1(7244.04,735)
  Bottom Layer w10: v1(5411.81,1542.71) 5413.17,1544.07 5463.3,1544.07 U3.14@5463.63,1543.74
Flp2_Filters1-2: IC7.5 IC31_Filters1-2.1 J13_Filters1-2.7 R23_Filters1-2.2 R26_Filters1-2.1 U2.14 | length 4018.8
  Top Layer w8: v1(7220,3610) 7234.9,3595.1 7235.54,3595.1 7246.5,3584.14 J13_Filters1-2.7@7246.5,3563.67
  Top Layer w10: v1(5311.41,2701.11) 5362.44,2650.08 IC7.5@5473.15,2650.08 5473.85,2650.78 5580.77,2650.78 v1(5581.47,2651.48) ; R26_Filters1-2.1@5796.5,3101.94 5706.8,3101.94 5694.8,3089.94 5694.8,2779.48 v1(5825.25,2649.03) 5828.93,2649.03 5842.17,2635.79 IC31_Filters1-2.1@5894.5,2635.76
  Layer 1 w8: v1(5642.85,3701.76) 5697.49,3702.14 ccw(c5697.31,3727.95) 5715.56,3709.7 5732.27,3726.4 cw(c5744.29,3714.38) 5744.19,3731.38 6236.44,3734.29 ccw(c6236.29,3760.1) 6243.83,3735.41 6301.94,3753.17 cw(c6306.91,3736.91) 6306.91,3753.91 6611.31,3753.91 cw(c6611.31,3736.91) 6615.24,3753.45 v1(7220,3610)
  Bottom Layer w10: U2.14@5259.6,2700.08 5259.93,2699.75 5310.06,2699.75 v1(5311.41,2701.11) ; v1(5642.85,3701.76) 5620.85,3701.76 5610.89,3691.81 5610.89,3306.35 5602,3297.46 5602,2742 5581.47,2721.47 v1(5581.47,2651.48) 5583.92,2649.03 v1(5825.25,2649.03)
Flp2_Filters3-4: IC14.5 IC31_Filters3-4.1 J13_Filters3-4.7 R23_Filters3-4.2 R26_Filters3-4.1 U4.14 | length 3503
  Top Layer w10: v1(5299.96,1186.11) 5350.98,1135.08 IC14.5@5461.69,1135.08 5462.36,1134.41 5530,1134.41 v1(5550,1114.41) ; R26_Filters3-4.1@5795,1495.59 5705.3,1495.59 5693.3,1483.59 5693.3,1171.11 5835,1029.41 IC31_Filters3-4.1@5893,1029.41 ; J13_Filters3-4.7@7245,1957.32 v1(7245,2015.37)
  Layer 1 w10: v1(5766.16,1794.48) 6294.8,1868.06 cw(c6298.5,1841.5) 6300.01,1868.27 6805.03,1839.8 cw(c6803.52,1813.03) 6808.78,1839.32 6914.74,1818.12 ccw(c6920,1844.41) 6920,1817.6 7000,1817.6 ccw(c7000,1844.41) 7017.25,1823.89 v1(7245,2015.37)
  Layer 2 w10: v1(5750,1114.41) 5766.35,1130.76 5766.35,1794.29 v1(5766.16,1794.48)
  Bottom Layer w10: U4.14@5248.15,1185.08 5248.47,1184.75 5298.6,1184.75 v1(5299.96,1186.11) ; v1(5550,1114.41) v1@5740,1114.41
Fout_1: IC4.8 J5.7 U1.13 | length 3064
  Top Layer w8: v1(5147.95,2944.56) 5148.64,2943.87 IC4.8@5259.44,2943.87
  Top Layer w10: J5.7@2931.81,2585 2939.02,2577.79 5132.62,2577.79 5142.33,2587.51 v1(5146.02,2587.51) ; IC4.8@5259.57,2943.74 5299.65,2943.74 5303.94,2948.03 5412.05,2948.03 v1(5413.88,2946.2)
  Layer 2 w8: v1(5146.02,2587.51) 5146.02,2942.63 v1(5147.95,2944.56)
  Bottom Layer w10: v1(5413.88,2946.2) 5394.74,2965.33 5394.74,3063.01 5425.48,3093.74 U1.13@5473.63,3093.74
Fout_2: IC7.8 J5.5 U2.13 | length 3156.3
  Top Layer w8: v1(5176.44,2775.67) 5176.82,2775.29 5297.01,2775.29 v1(5319.35,2797.62)
  Top Layer w10: J5.5@2931.38,2634.57 2910.91,2634.57 2883.38,2607.04 2883.38,2564.65 2899.2,2548.83 5175.25,2548.83 v1(5176.91,2547.17) ; v1(5319.35,2797.62) 5321.18,2795.79 5429.29,2795.79 5433.58,2800.08 IC7.8@5473.15,2800.08
  Layer 2 w10: v1(5176.44,2775.67) 5176.91,2775.19 v1(5176.91,2547.17)
  Bottom Layer w10: U2.13@5259.6,2650.08 5307.75,2650.08 5338.48,2680.81 5338.48,2778.49 v1(5319.35,2797.62)
Fout_3: IC13.8 J5.3 U3.13 | length 3906.1
  Top Layer w8: v1(5167.27,1446.2) v1@5169.74,1443.74
  Top Layer w10: J5.3@2931.81,2685 2911.34,2685 2865.38,2639.04 2865.38,2557.2 2891.75,2530.83 4756.55,2530.83 4967.96,2319.43 v1(5166.96,2319.43) ; v1@5169.74,1443.74 5170.97,1444.97 5248.85,1444.97 IC13.8@5250.08,1443.74 5289.65,1443.74 5293.94,1448.03 5395.35,1448.03 5400.2,1443.19 v1(5403.88,1443.19)
  Layer 2 w10: v1(5166.96,2319.43) 5166.96,2287.29 5171.54,2282.71 5171.54,1870.57 5167.27,1866.31 v1(5167.27,1446.2)
  Bottom Layer w10: v1(5403.88,1443.19) 5403.88,1446.2 5384.74,1465.33 5384.74,1563.01 5415.48,1593.74 U3.13@5463.63,1593.74
Fout_4: IC14.8 J5.1 U4.13 | length 4207
  Top Layer w8: 5151.21,1260.29 5285.55,1260.29 v1(5307.89,1282.62)
  Top Layer w10: J5.1@2931.81,2735 2930.06,2733.25 2887.24,2733.25 2847.38,2693.39 2847.38,2549.74 2884.59,2512.54 4749.39,2512.54 4960.5,2301.43 5114.91,2301.43 v1(5144.73,2271.61) ; v1(5307.89,1282.62) 5309.72,1280.79 5417.83,1280.79 5422.13,1285.08 IC14.8@5462.2,1285.08
  Layer 2 w10: v1(5138.71,1264.19) 5138.71,1460.21 5143.14,1464.64 5143.14,2244.06 5143.06,2244.14 5143.06,2269.94 v1(5144.73,2271.61)
  Bottom Layer w10: U4.13@5248.15,1135.08 5296.3,1135.08 5327.03,1165.81 5327.03,1263.49 v1(5307.89,1282.62)
Freq1_1_Filters1-2: IC10_Filters1-2.1 R49_Filters1-2.1 | length 793.1
  Top Layer w8: R49_Filters1-2.1@6788.43,2285.76 6789.9,2287.24 v1(7066.83,2287.24) ; v1(7066.5,2750.76) 7066.5,2799.76 IC10_Filters1-2.1@7067.5,2800.76
  Bottom Layer w8: v1(7066.5,2750.76) 7066.5,2287.57 v1(7066.83,2287.24)
Freq1_1_Filters3-4: IC10_Filters3-4.1 R49_Filters3-4.1 | length 793.1
  Top Layer w8: R49_Filters3-4.1@6786.93,679.41 6788.41,680.89 v1(7065.33,680.89) ; v1(7065,1144.41) 7065,1193.41 IC10_Filters3-4.1@7066,1194.41
  Bottom Layer w8: v1(7065,1144.41) 7065,681.22 v1(7065.33,680.89)
Freq1_2_Filters1-2: IC30_Filters1-2.1 R60_Filters1-2.1 | length 524.8
  Top Layer w8: IC30_Filters1-2.1@5889.5,3100.76 6005.91,3100.76 v1@6041.5,3136.35 ; v1(6181.5,3386.35) R60_Filters1-2.1@6228.03,3386.35
  Bottom Layer w8: v1(6043.22,3143.83) 6043.22,3148.06 6049.94,3154.78 6067.37,3172.22 6067.37,3292.22 6161.5,3386.35 v1(6181.5,3386.35)
Freq1_2_Filters3-4: IC30_Filters3-4.1 R60_Filters3-4.1 | length 524.8
  Top Layer w8: IC30_Filters3-4.1@5888,1494.41 6004.41,1494.41 v1@6040,1530 ; v1(6180,1780) R60_Filters3-4.1@6226.54,1780
  Bottom Layer w8: v1(6041.72,1537.49) 6041.72,1541.71 6048.44,1548.43 6065.88,1565.88 6065.88,1685.88 6160,1780 v1(6180,1780)
Freq2_1_Filters1-2: IC10_Filters1-2.16 R50_Filters1-2.1 | length 704.3
  Top Layer w8: R50_Filters1-2.1@6788.43,2230.76 v1(6911.5,2230.76) ; IC10_Filters1-2.16@6884.5,2800.76 6891.5,2793.76 v1(6891.5,2760.76)
  Bottom Layer w8: v1(6891.5,2760.76) 6891.5,2470.76 6911.5,2450.76 v1(6911.5,2230.76)
Freq2_1_Filters3-4: IC10_Filters3-4.16 R50_Filters3-4.1 | length 715.3
  Top Layer w8: R50_Filters3-4.1@6786.93,624.41 v1(6910,624.41) ; IC10_Filters3-4.16@6872,1194.41 6883,1194.41 6890,1187.41 v1(6890,1154.41)
  Bottom Layer w8: v1(6890,1154.41) 6890,864.41 6910,844.41 v1(6910,624.41)
Freq2_2_Filters1-2: IC30_Filters1-2.16 R61_Filters1-2.1 | length 346.3
  Top Layer w8: v1(6083.37,3142.18) 6083.37,3100.88 IC30_Filters1-2.16@6083.5,3100.76 ; v1(6191.5,3336.35) R61_Filters1-2.1@6228.03,3336.35
  Bottom Layer w8: v1(6083.37,3142.18) 6083.37,3278.22 6141.5,3336.35 v1(6191.5,3336.35)
Freq2_2_Filters3-4: IC30_Filters3-4.16 R61_Filters3-4.1 | length 346.3
  Top Layer w8: v1(6081.88,1535.84) 6081.88,1494.53 IC30_Filters3-4.16@6082,1494.41 ; v1(6190,1730) R61_Filters3-4.1@6226.54,1730
  Bottom Layer w8: v1(6081.88,1535.84) 6081.88,1671.88 6140,1730 v1(6190,1730)
GND: C1.1 C2.1 C3.2 C4.1 C7.2 C8.2 C13_Filters1-2.2 C13_Filters3-4.2 C14_Filters1-2.2 C14_Filters3-4.2 C15_Filters1-2.2 C15_Filters3-4.2 C16_Filters1-2.2 C16_Filters3-4.2 C17_Filters1-2.2 C17_Filters3-4.2 C18_Filters1-2.2 C18_Filters3-4.2 C19_Filters1-2.2 C19_Filters3-4.2 C20_Filters1-2.1 C20_Filters3-4.1 C21_Filters1-2.1 C21_Filters3-4.1 C22_Filters1-2.1 C22_Filters3-4.1 C23_Filters1-2.1 C23_Filters3-4.1 C24_Filters1-2.1 C24_Filters3-4.1 C25_Filters1-2.1 C25_Filters3-4.1 C26_Filters1-2.1 C26_Filters3-4.1 IC1.1 IC2.1 IC3.1 IC4.15 IC7.15 IC8.6 IC8.7 IC8.8 IC9.5 IC10_Filters1-2.4 IC10_Filters1-2.13 IC10_Filters3-4.4 IC10_Filters3-4.13 IC11_Filters1-2.5 IC11_Filters3-4.5 IC12_Filters1-2.3 IC12_Filters1-2.5 IC12_Filters3-4.3 IC12_Filters3-4.5 IC13.15 IC14.15 IC15_Filters1-2.3 IC15_Filters1-2.5 IC15_Filters3-4.3 IC15_Filters3-4.5 IC16_Filters1-2.3 IC16_Filters1-2.5 IC16_Filters3-4.3 IC16_Filters3-4.5 IC30_Filters1-2.4 IC30_Filters1-2.13 IC30_Filters3-4.4 IC30_Filters3-4.13 IC31_Filters1-2.5 IC31_Filters3-4.5 IC32_Filters1-2.3 IC32_Filters1-2.5 IC32_Filters3-4.3 IC32_Filters3-4.5 J4.1 J4.2 J4.3 J4.4 J6.2 J10_Filters1-2.5 J10_Filters3-4.5 J13_Filters1-2.5 J13_Filters3-4.5 Q1_Filters1-2.1 Q1_Filters3-4.1 Q2_Filters1-2.1 Q2_Filters3-4.1 Q5_Filters1-2.1 Q5_Filters3-4.1 Q6_Filters1-2.1 Q6_Filters3-4.1 R1_Filters1-2.1 R1_Filters3-4.1 R3_Filters1-2.1 R3_Filters3-4.1 R12_Filters1-2.1 R12_Filters3-4.1 R14_Filters1-2.1 R14_Filters3-4.1 R17_Filters1-2.1 R17_Filters3-4.1 R19_Filters1-2.1 R19_Filters3-4.1 R30_Filters1-2.1 R30_Filters3-4.1 R32_Filters1-2.1 R32_Filters3-4.1 R43_Filters1-2.2 R43_Filters3-4.2 R45_Filters1-2.2 R45_Filters3-4.2 R53_Filters1-2.2 R53_Filters3-4.2 R55_Filters1-2.2 R55_Filters3-4.2 U1.6 U1.8 U2.6 U2.8 U3.6 U3.8 U4.6 U4.8 | length 15707.9
  Top Layer w8: IC2.1@4080,3170 v1(4140,3170) 4188.5,3170 C4.1@4200,3158.5 ; v1@4105.01,2920 v1(4107.51,2917.51) ; v1(4142.99,2877.01) C7.2@4200,2877.01 ; v1(4148.5,3081.5) 4248.5,3081.5 v1(4250,3080) ; v1(4151.5,3298.5) C3.2@4200,3298.5
  Top Layer w10: v1(2701.81,2970) J4.4@2766.46,2970 ; v1(2701.81,3020) J4.2@2766.46,3020 ; J4.3@2931.81,2970 v1(2998.27,2970) ; J4.1@2931.81,3020 v1(2998.27,3020) ; C2.1@3330,3082.99 3387.01,3082.99 v1(3399.84,3070.16) IC1.1@3448.11,3070.16 v1(3448.11,3118.43) ; IC1.1@3447.44,3068.92 v1(3495.7,3068.92) ; IC9.5@3477.4,1300 3478.63,1298.77 3518.82,1298.77 3530.47,1287.13 3534.76,1287.13 v1(3537.37,1284.52) ; v1(3761.7,1278.3) 3794.4,1245.6 3832.69,1245.6 IC8.6@3833.58,1244.71 IC8.8@3833.58,1144.71 v1(3833.58,1103.58) ; v1@4008.99,2393.03 4009.1,2393.14 4054.2,2393.14 J6.2@4054.31,2393.03 ; J6.2@4055,2392.56 v1(4055,2422.56) ; J6.2@4055.69,2392.09 4055.8,2391.98 4101.12,2391.98 v1(4101.7,2391.4) ; v1(5188.52,985.19) 5188.58,985.13 5247.58,985.13 IC14.15@5247.63,985.08 ; v1(5199.98,2500.79) 5200.33,2500.43 5258.74,2500.43 IC7.15@5259.09,2500.08 ; IC13.15@5464.14,1743.74 5464.49,1743.38 5522.9,1743.38 v1(5523.25,1743.03) ; IC4.15@5474.14,3243.74 5474.49,3243.38 5532.9,3243.38 v1(5533.25,3243.03) ; v1@5702.97,809.41 5703.24,809.68 5758.55,809.68 R19_Filters3-4.1@5758.82,809.41 ; v1@5704.47,2415.76 5704.73,2416.02 5760.05,2416.02 R19_Filters1-2.1@5760.31,2415.76 ; R30_Filters3-4.1@5795,1343.23 5796.18,1344.41 IC30_Filters3-4.4@5888,1344.41 ; R30_Filters1-2.1@5796.5,2949.58 5797.68,2950.76 v1(5831.5,2950.76) IC30_Filters1-2.4@5889.5,2950.76 ; v1@5831.16,1844.41 5831.43,1844.68 5886.74,1844.68 C22_Filters3-4.1@5887.01,1844.41 ; v1@5832.01,1759.27 5832.14,1759.4 5887.73,1759.4 IC32_Filters3-4.5@5887.86,1759.27 ; v1@5832.66,3450.76 5832.92,3451.02 5888.24,3451.02 C22_Filters1-2.1@5888.5,3450.76 ; v1@5833.51,3365.62 5833.64,3365.75 5889.22,3365.75 IC32_Filters1-2.5@5889.35,3365.61 ; v1@5867.52,754.92 5869.49,754.92 5907.01,792.44 C21_Filters3-4.1@5907.01,794.41 ; v1@5869.01,2361.27 5870.98,2361.27 5908.5,2398.79 C21_Filters1-2.1@5908.5,2400.76 ; v1(6020.58,1709.84) 6020.87,1709.56 6081.57,1709.56 IC32_Filters3-4.3@6081.86,1709.27 ; v1(6022.08,3316.19) 6022.36,3315.9 6083.07,3315.9 IC32_Filters1-2.3@6083.35,3315.61 ; IC30_Filters3-4.13@6082,1344.41 R32_Filters3-4.1@6170,1344.41 6170,1314.41 v1(6190,1294.41) ; IC30_Filters1-2.13@6083.5,2950.76 R32_Filters1-2.1@6171.5,2950.76 6171.5,2920.76 v1(6191.5,2900.76) ; IC31_Filters3-4.5@6087,879.41 6089.5,876.91 6144.37,876.91 v1(6146.87,874.41) ; IC31_Filters1-2.5@6088.5,2485.76 6091,2483.26 6145.87,2483.26 v1(6148.37,2480.76) ; v1(6090.25,1907) 6090.25,1903.31 6092.99,1900.57 C15_Filters3-4.2@6092.99,1844.41 ; C15_Filters1-2.2@6094.49,3450.76 6094.95,3451.22 v1(6094.95,3520.26) ; C14_Filters3-4.2@6102.99,794.41 6103.26,794.14 6158.57,794.14 v1@6158.84,794.41 ; C14_Filters1-2.2@6104.49,2400.76 6104.75,2400.49 6160.07,2400.49 v1@6160.34,2400.76 ; C25_Filters3-4.1@6170,1021.42 6170.49,1020.93 v1(6219.17,1020.93) ; C19_Filters3-4.2@6170,1161.42 v1(6219.22,1161.42) ; C25_Filters1-2.1@6171.5,2627.76 6171.98,2627.28 v1(6220.66,2627.28) ; C19_Filters1-2.2@6171.5,2767.76 v1(6220.72,2767.76) ; Q5_Filters3-4.1@6244.63,2033.4 v1(6244.63,2073.89) ; Q5_Filters1-2.1@6246.13,3639.75 R53_Filters1-2.2@6385.02,3639.75 ; R17_Filters3-4.1@6295,1395.59 6295.27,1395.86 6295.27,1451.17 v1@6295,1451.44 ; R17_Filters1-2.1@6296.5,3001.94 6296.76,3002.2 6296.76,3057.52 v1@6296.5,3057.79 ; v1(6311.5,1585.59) 6314.1,1588.2 6318.67,1588.2 6358.5,1628.03 C18_Filters3-4.2@6358.5,1630 ; v1(6312.99,3191.94) 6315.6,3194.54 6320.17,3194.54 6360,3234.38 C18_Filters1-2.2@6360,3236.35 ; R53_Filters3-4.2@6384,2032.93 v1(6384,2075.32) ; v1(6384.86,3672.74) 6384.86,3639.91 R53_Filters1-2.2@6385.02,3639.75 ; R53_Filters1-2.2@6385.5,3639.28 R53_Filters1-2.2@6385.02,3639.75 ; v1(6405.59,774.41) R43_Filters3-4.2@6448.07,774.41 6447.6,773.94 Q1_Filters3-4.1@6447.6,635.04 ; v1(6406.9,2380.76) R43_Filters1-2.2@6449.57,2380.76 6449.09,2380.28 Q1_Filters1-2.1@6449.09,2241.39 ; Q2_Filters3-4.1@6437.6,1045.04 6437.6,985.41 6443.6,979.41 6526.38,979.41 6576.38,929.41 6670,929.41 6692.28,907.13 6704.25,907.13 6715,896.38 R45_Filters3-4.2@6715,894.41 ; Q2_Filters1-2.1@6439.09,2651.39 6439.09,2591.76 6445.09,2585.76 6528.64,2585.76 6578.64,2535.76 6671.5,2535.76 6693.78,2513.47 6705.75,2513.47 6716.5,2502.73 R45_Filters1-2.2@6716.5,2500.76 ; R55_Filters3-4.2@6504,1766 6505.97,1766 6533,1793.03 6533,1833 IC16_Filters3-4.3@6539,1839 6539,1903.86 6589,1953.86 6589,2037.4 6595,2043.4 Q6_Filters3-4.1@6654.63,2043.4 ; R55_Filters1-2.2@6505.5,3372.35 6507.46,3372.35 6534.5,3399.38 6534.5,3439.35 IC16_Filters1-2.3@6540.5,3445.35 6540.5,3515.11 6590.5,3565.11 6590.5,3643.75 6596.5,3649.75 Q6_Filters1-2.1@6656.13,3649.75 ; C26_Filters3-4.1@6581.5,1630 6581.5,1628.03 6617.19,1592.34 v1(6617.19,1589.31) ; C26_Filters1-2.1@6582.99,3234.38 6618.69,3198.69 v1(6618.69,3195.66) ; v1@6659,1237.38 6658.73,1237.65 6658.73,1292.96 R14_Filters3-4.1@6659,1293.23 ; v1@6660.5,2843.73 6660.23,2843.99 6660.23,2899.31 R14_Filters1-2.1@6660.5,2899.58 ; v1(6730,1664.41) 6733.69,1664.41 6736.68,1667.4 C23_Filters3-4.1@6780,1667.4 ; v1(6731.17,1535.31) 6779.1,1535.31 C16_Filters3-4.2@6780,1534.41 ; v1(6731.5,3270.76) 6735.18,3270.76 6738.17,3273.75 C23_Filters1-2.1@6781.5,3273.75 ; v1(6732.67,3141.65) 6780.6,3141.65 C16_Filters1-2.2@6781.5,3140.76 ; v1(6763.53,1396.47) 6784,1376 R1_Filters3-4.1@6784,1344.41 IC10_Filters3-4.13@6872,1344.41 ; v1(6765.02,3002.82) 6785.5,2982.35 R1_Filters1-2.1@6785.5,2950.76 IC10_Filters1-2.13@6873.5,2950.76 ; v1@6801.16,1894.41 6801.43,1894.68 6856.74,1894.68 C13_Filters3-4.2@6857.01,1894.41 ; v1@6802.66,3500.76 6802.92,3501.02 6858.24,3501.02 C13_Filters1-2.2@6858.5,3500.76 ; v1(6803.52,1813.03) 6807.21,1813.03 6810.83,1809.41 IC11_Filters3-4.5@6867,1809.41 ; v1(6805.02,3419.38) 6808.7,3419.38 6812.32,3415.76 IC11_Filters1-2.5@6868.5,3415.76 ; v1@6816.15,979.41 6816.28,979.54 6871.87,979.54 IC12_Filters3-4.3@6872,979.41 ; v1@6817.65,2585.76 6817.78,2585.89 6873.36,2585.89 IC12_Filters1-2.3@6873.5,2585.76 ; v1(6870,784.41) C17_Filters3-4.2@6870,844.41 ; v1(6871.5,2390.76) C17_Filters1-2.2@6871.5,2450.76 ; C20_Filters3-4.1@7062.99,1894.41 7062.99,1896.38 7100.51,1933.9 v1@7102.48,1933.9 ; C20_Filters1-2.1@7064.49,3502.73 7094.93,3533.16 7094.93,3537.64 v1(7097.53,3540.25) ; IC12_Filters3-4.5@7066,929.41 7066.13,929.28 7121.72,929.28 v1@7121.85,929.41 ; IC10_Filters3-4.4@7066,1344.41 7157.82,1344.41 R3_Filters3-4.1@7159,1345.59 ; IC12_Filters1-2.5@7067.5,2535.76 7067.63,2535.62 7123.21,2535.62 v1@7123.34,2535.76 ; IC10_Filters1-2.4@7067.5,2950.76 7159.31,2950.76 R3_Filters1-2.1@7160.5,2951.94 ; C24_Filters3-4.1@7072.99,844.41 7073.26,844.14 7128.57,844.14 v1@7128.84,844.41 ; C24_Filters1-2.1@7074.49,2450.76 7074.75,2450.49 7130.07,2450.49 v1@7130.34,2450.76 ; R12_Filters3-4.1@7195.18,1879.41 7195.45,1879.14 7250.76,1879.14 v1@7251.03,1879.41 ; R12_Filters1-2.1@7196.68,3485.76 7196.94,3485.49 7252.26,3485.49 v1@7252.53,3485.76 ; v1(7252.79,3485.49) 7255.4,3488.1 7255.4,3502.1 7296.5,3543.2 J13_Filters1-2.5@7296.5,3563.67 ; 7260,1890 7260,1901.85 7295,1936.85 J13_Filters3-4.5@7295,1957.32 ; v1(7295,621.49) J10_Filters3-4.5@7295,674.65 ; v1(7296.5,2221.18) J10_Filters1-2.5@7296.5,2280.99
  Top Layer w25: v1(3282.99,2877.01) C1.1@3330,2877.01 v1(3377.01,2877.01) ; v1(4060,2880) IC3.1@4060,2920 v1@4105.01,2920
  Layer 1 w12: v1(5833.24,3365.88) 5859,3340.12 5998.15,3340.12 v1(6022.08,3316.19)
  Layer 1 w20: v1@6191.34,1294.77 v1(6190,1294.41) cw(c6193.77,1274.77) 6195.79,1294.67 6275.03,1286.62 cw(c6270,1237.07) 6276.38,1286.47 v1(6658.73,1237.11)
  Layer 1 w25: v1(5704.2,2416.02) 5961.86,2491.43 cw(c5971.5,2458.5) 5973.85,2492.73 v1(6148.37,2480.76) ; v1(5823.31,2760.4) v1(6220.72,2767.76) ; v1(5830,1344.41) 6151.68,1328.68 cw(c6150,1294.41) 6179.43,1312.05 v1(6190,1294.41) ; v1(5831.5,2950.76) 6158.89,2950.76 6158.96,2950.76 cw(c6158.82,2925.76) 6182.95,2932.3 v1(6191.5,2900.76) ; v1(5831.74,1759.53) v1(6020.58,1709.84) ; v1(5900,3150) 5989.64,3150 ccw(c5989.64,3175) 6007.29,3157.29 v1(6010,3160) ; v1(6296.76,3058.05) v1(6660.23,2843.46) ; v1(6311.5,1585.59) 6409.17,1547.98 ccw(c6421.5,1580) 6421.5,1545.69 6518.5,1545.69 ccw(c6518.5,1580) 6533.35,1549.07 v1(6617.19,1589.31) ; v1(6312.99,3191.94) 6413.97,3219.45 cw(c6422.99,3186.35) 6422.99,3220.66 6520,3220.66 cw(c6520,3186.35) 6528.8,3219.51 v1(6618.69,3195.66) ; v1(6384,2075.32) v1(6619.19,2043.4) ; v1(6439.09,2615.95) 6575.73,2572.36 ccw(c6586.16,2605.05) 6588.44,2570.81 6815.65,2585.96 cw(c6817.38,2561.02) v1(6817.38,2586.02) cw(c6817.38,2561.02) 6821.49,2585.68 v1(7123.61,2535.49) ; v1(6731.5,3270.76) 6994.85,3244.9 cw(c6991.5,3210.76) 6997.09,3244.61 v1(7070,3232.57) ; v1(6763.53,1396.47) 6774.06,1377.65 ccw(c6804,1394.41) 6804.32,1360.1 6935.09,1361.33 ccw(c6934.77,1395.64) 6936.57,1361.37 6995.96,1364.49 cw(c6997.76,1330.23) 7003.3,1364.09 v1(7123.36,1344.41) ; v1(6765.02,3002.82) 6775.55,2984 ccw(c6805.5,3000.76) 6803.82,2966.49 v1(7124.85,2950.76) ; v1@6801.87,1893.7 v1(7102.86,1933.9) ; v1(6803.52,1813.03) v1(7150,1680) ; v1(6871.5,2390.76) v1(7130.6,2450.49)
  Layer 2 w10: v1(3120,2470) v1(3280,2470) ; v1(3120,2780) v1(3280,2780) ; v1(3120,2880) 3122.21,2877.79 3282.21,2877.79 v1(3282.99,2877.01) ; v1(3120,2980) v1(3280,2980) ; v1(3430,1110) v1(3543.14,1223.14)
  Bottom Layer w10: v1(5180.88,3294.63) 5181.77,3293.74 U1.8@5260.08,3293.74 ; v1(5195.79,3194.89) 5196.94,3193.74 U1.6@5260.08,3193.74 ; v1(5197.76,1693.67) v1(5197.76,1693.67) U3.6@5250.08,1693.74 ; v1(5197.76,1793.89) 5197.91,1793.74 U3.8@5250.08,1793.74 ; U4.8@5461.69,935.08 5524.84,935.08 v1(5525.98,933.93) ; U4.6@5461.69,1035.08 5524.84,1035.08 v1(5525.98,1033.93) ; U2.8@5473.15,2450.08 5536.29,2450.08 v1(5537.44,2448.93) ; U2.6@5473.15,2550.08 5536.29,2550.08 v1(5537.44,2548.93)
  other v1: 5867.14,754.92 6159.11,794.14 5702.7,809.68 7129.11,844.14 7122.11,929.14 6815.89,979.68 6437.6,1009.6 6295.27,1451.7 5830.89,1844.68 7251.3,1879.14 6800.89,1894.68 5868.64,2361.27 4008.3,2393.72 6160.6,2400.49 5832.39,3451.02 6802.39,3501.02 6620.69,3649.75
MISO: IC6.9 IC9.3 J3.7 | length 2409
  Top Layer w8: J3.7@2930,3155 3024.73,3155 v1(3026.63,3156.9)
  Top Layer w10: v1(3193.19,1870) IC6.9@3325.43,1870 ; v1(3195,1265) 3295,1265 3304.41,1274.41 IC9.3@3402.6,1274.41
  Bottom Layer w10: v1(3026.63,3156.9) 3156.63,3026.9 3156.63,2056.29 3176.81,2036.11 3176.81,1986.56 3200.73,1962.64 3200.73,1890 3195.8,1885.07 3195.8,1872.61 v1(3193.19,1870) 3193.19,1266.81 v1(3195,1265)
MOSI: IC5.14 J3.5 | length 1437.2
  Top Layer w8: J3.5@2930,3205 3052.4,3205 v1(3054.34,3206.94)
  Top Layer w10: v1(3190,2090) 3205,2075 IC5.14@3322.72,2075
  Bottom Layer w10: v1(3054.34,3206.94) 3184.34,3076.94 3184.34,2099.35 3190,2093.69 v1(3190,2090)
NetC1_Filters1-2_1: C1_Filters1-2.1 IC15_Filters1-2.1 Q3_Filters1-2.1 | length 155.8
  Top Layer w8: IC15_Filters1-2.1@6645.5,2435.76 6647.5,2433.76 6647.5,2374.44 6652.5,2369.44 6652.5,2360.76 6654.5,2358.76 6677,2358.76 6684.37,2351.39 C1_Filters1-2.1@6726.5,2351.39
NetC1_Filters1-2_2: C1_Filters1-2.2 IC15_Filters1-2.2 R42_Filters1-2.1 R47_Filters1-2.2 | length 476.1
  Top Layer w8: R42_Filters1-2.1@6649.96,2240.76 6649.96,2324.32 6598.5,2375.79 6598.5,2411.73 6592.5,2417.73 6592.5,2462.76 6615.5,2485.76 6671.5,2485.76 6706.87,2450.38 6706.87,2445.81 6722.56,2430.13 6784.06,2430.13 R47_Filters1-2.2@6786.5,2427.69